# Altium PCB Module_AFE_old.PcbDoc
Units mm, origin at the board's own origin, x right, y up, seen from the top; angles counter-clockwise.
Board outline 27 x 38 mm, 4 copper layers (Top Copper Layer, Internal Copper Layer 1, Internal Copper Layer 2, Bottom Copper Layer), stack 0.38 mm thick; 5 components, 32 nets, 53 pads, 20 vias.
Unrouted connection lines stored in the file: 4.
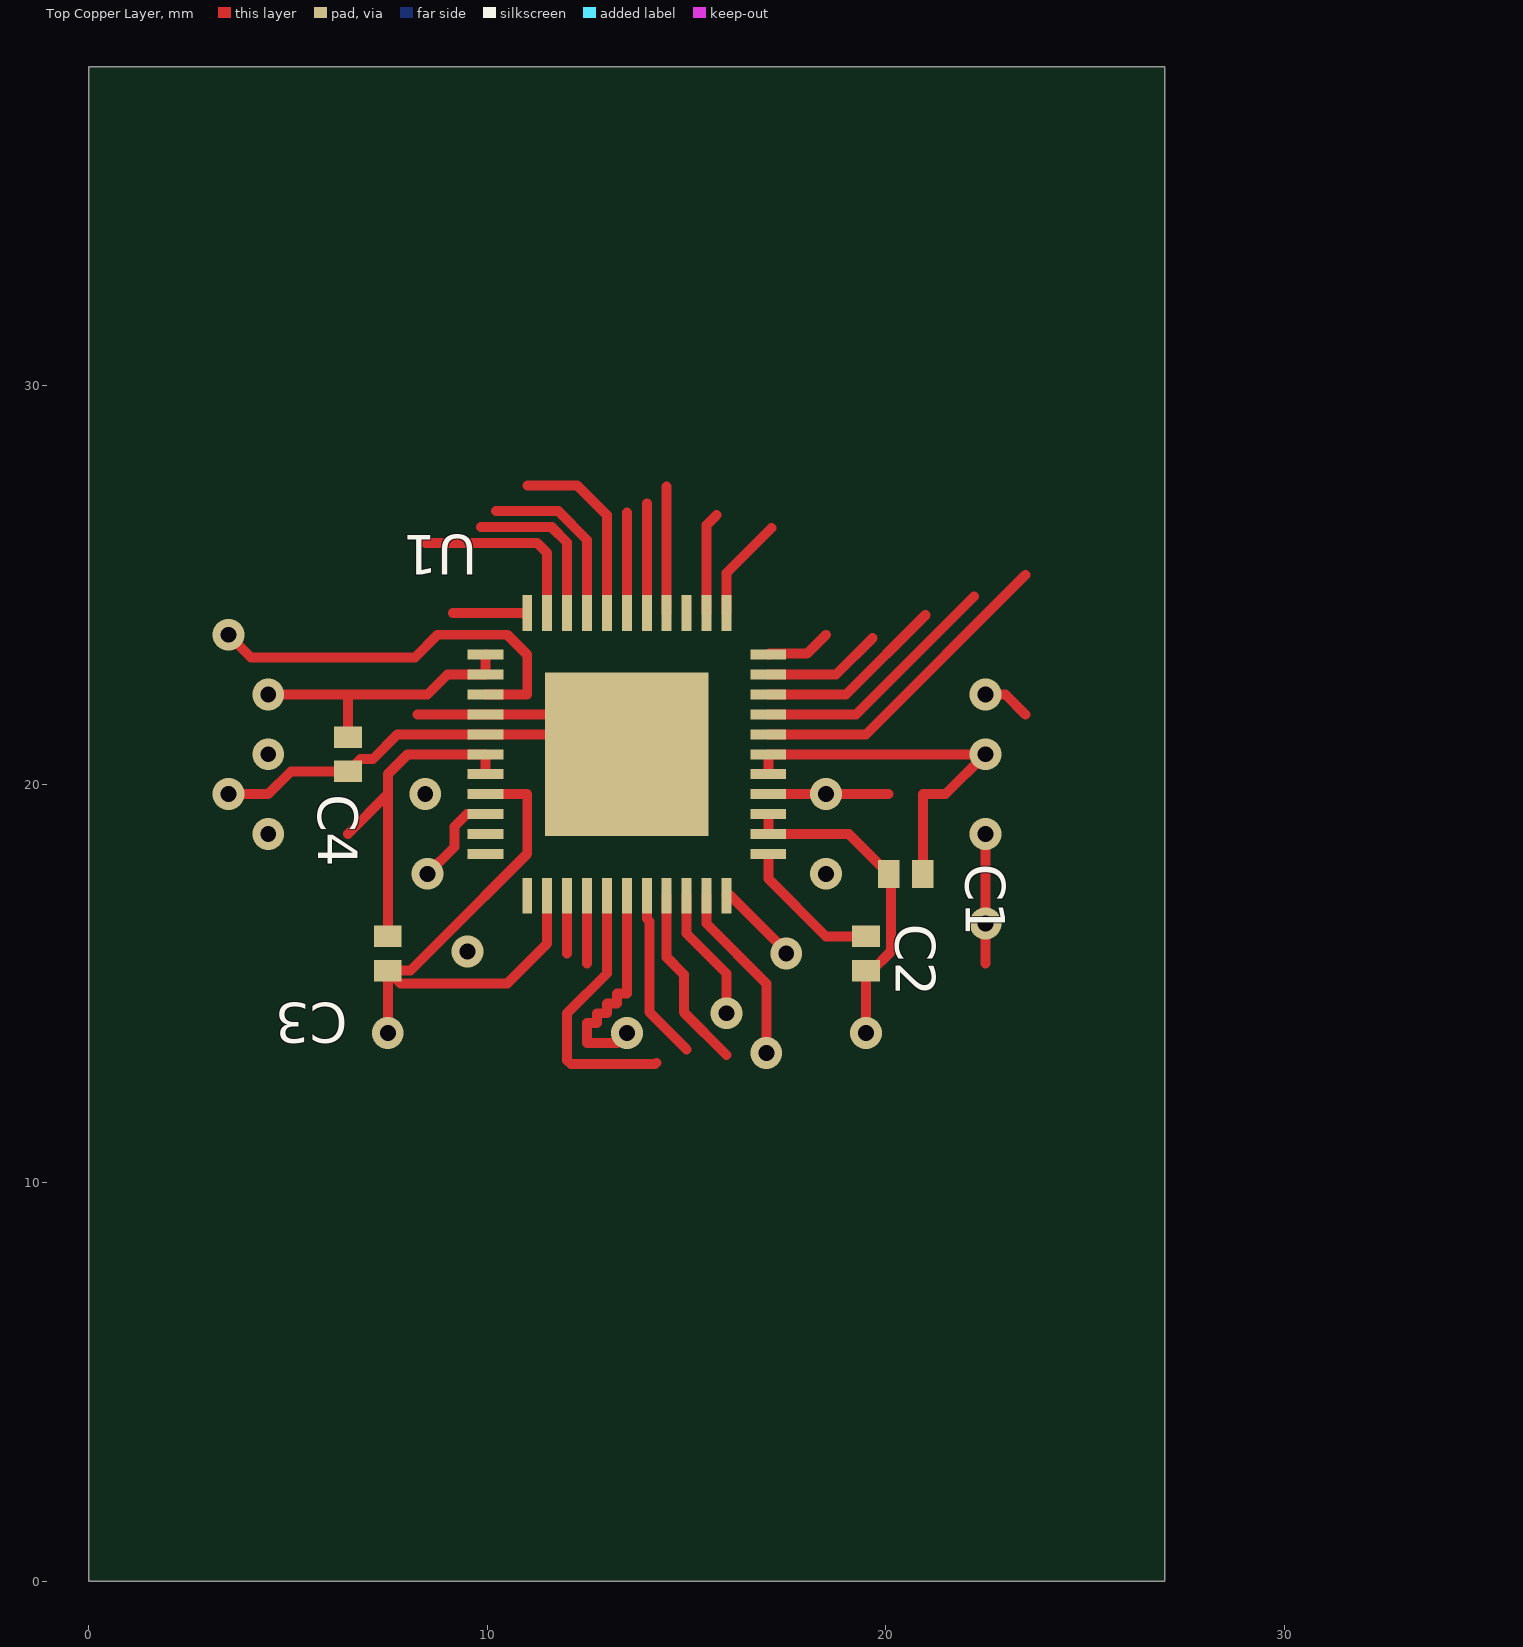
[diagram p0: Top Copper Layer view]
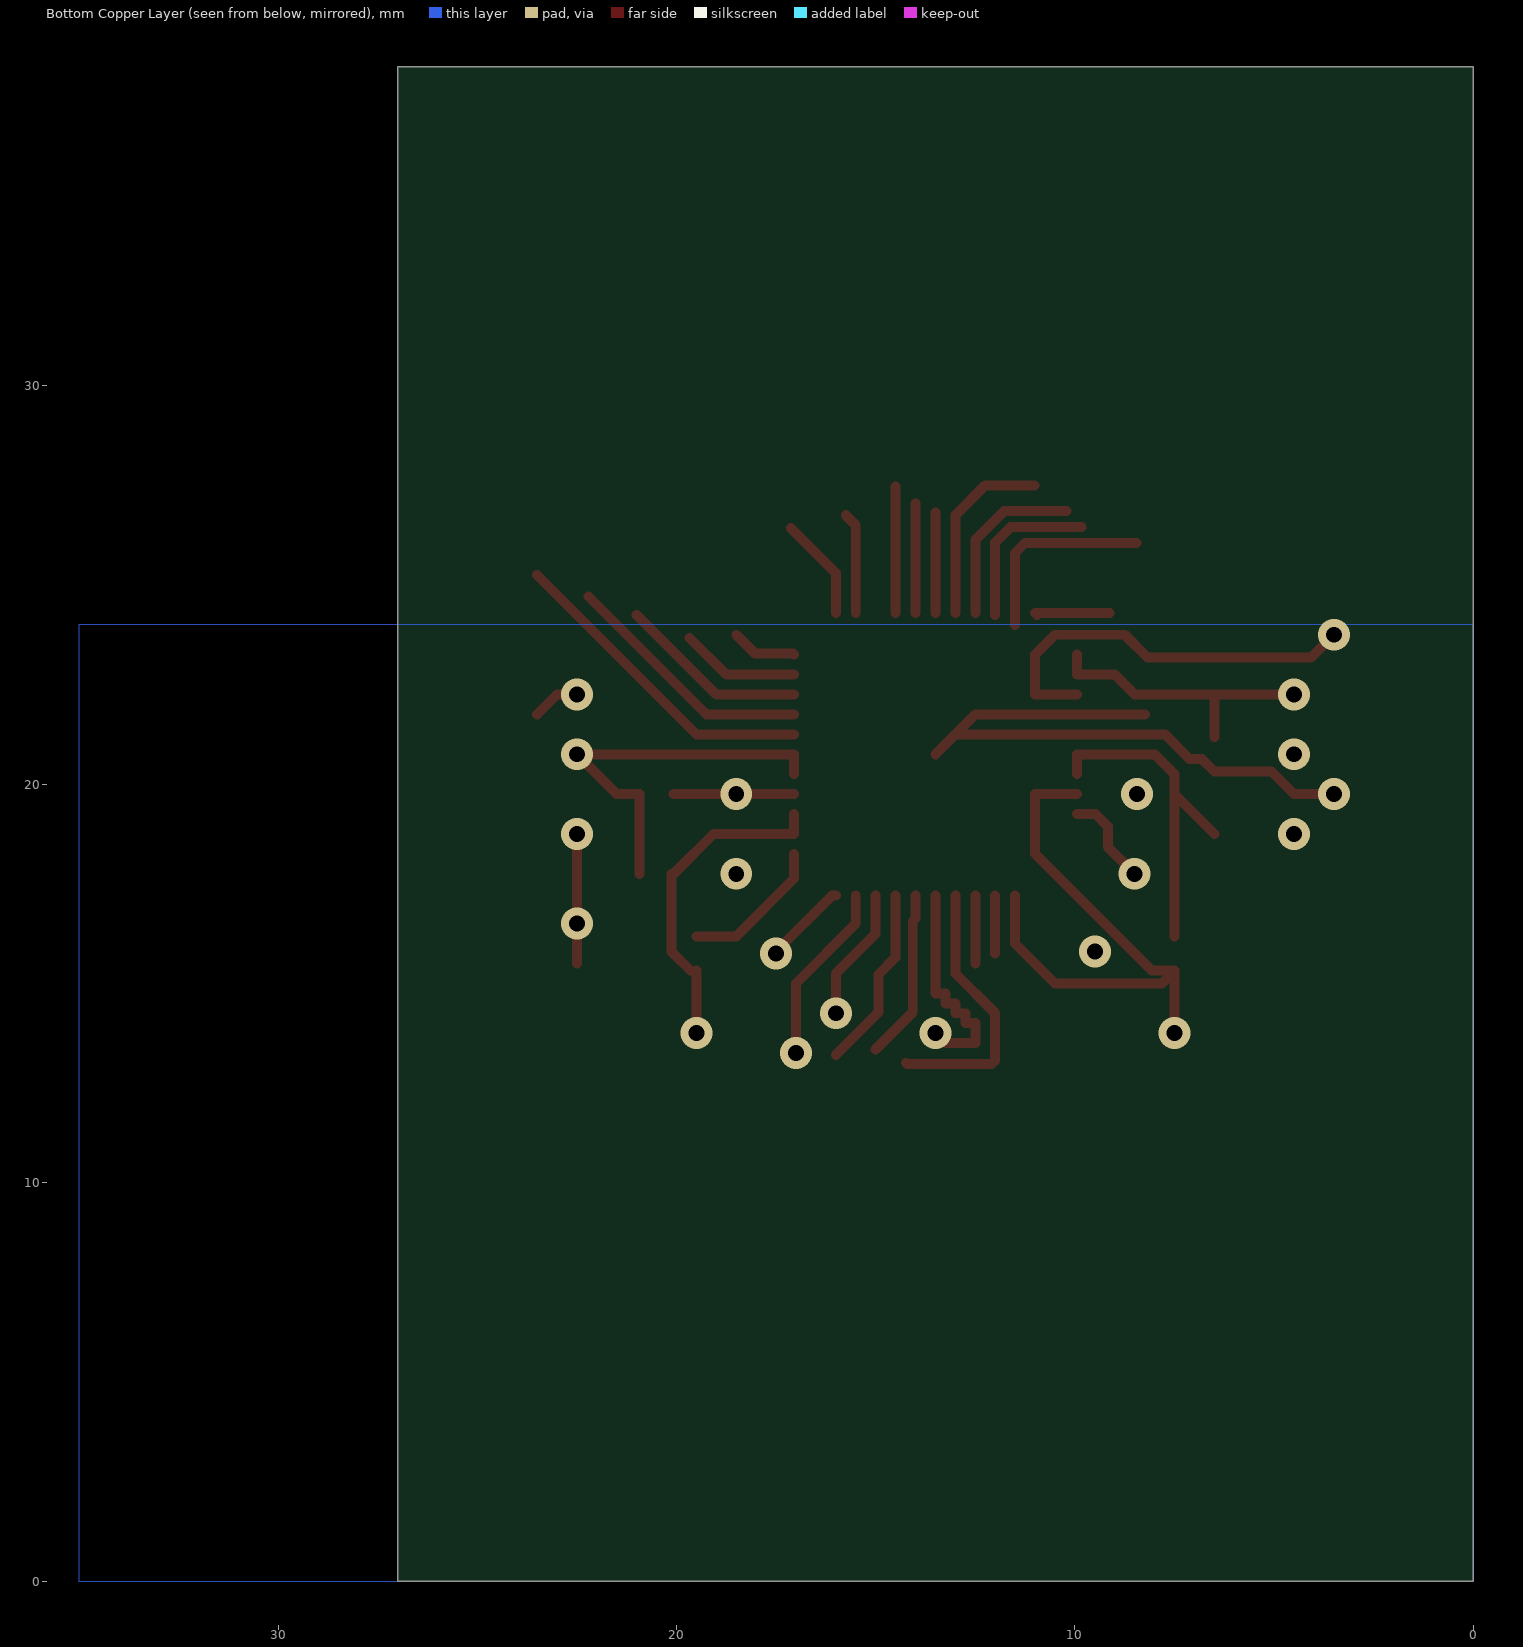
[diagram p1: Bottom Copper Layer view, seen from below]
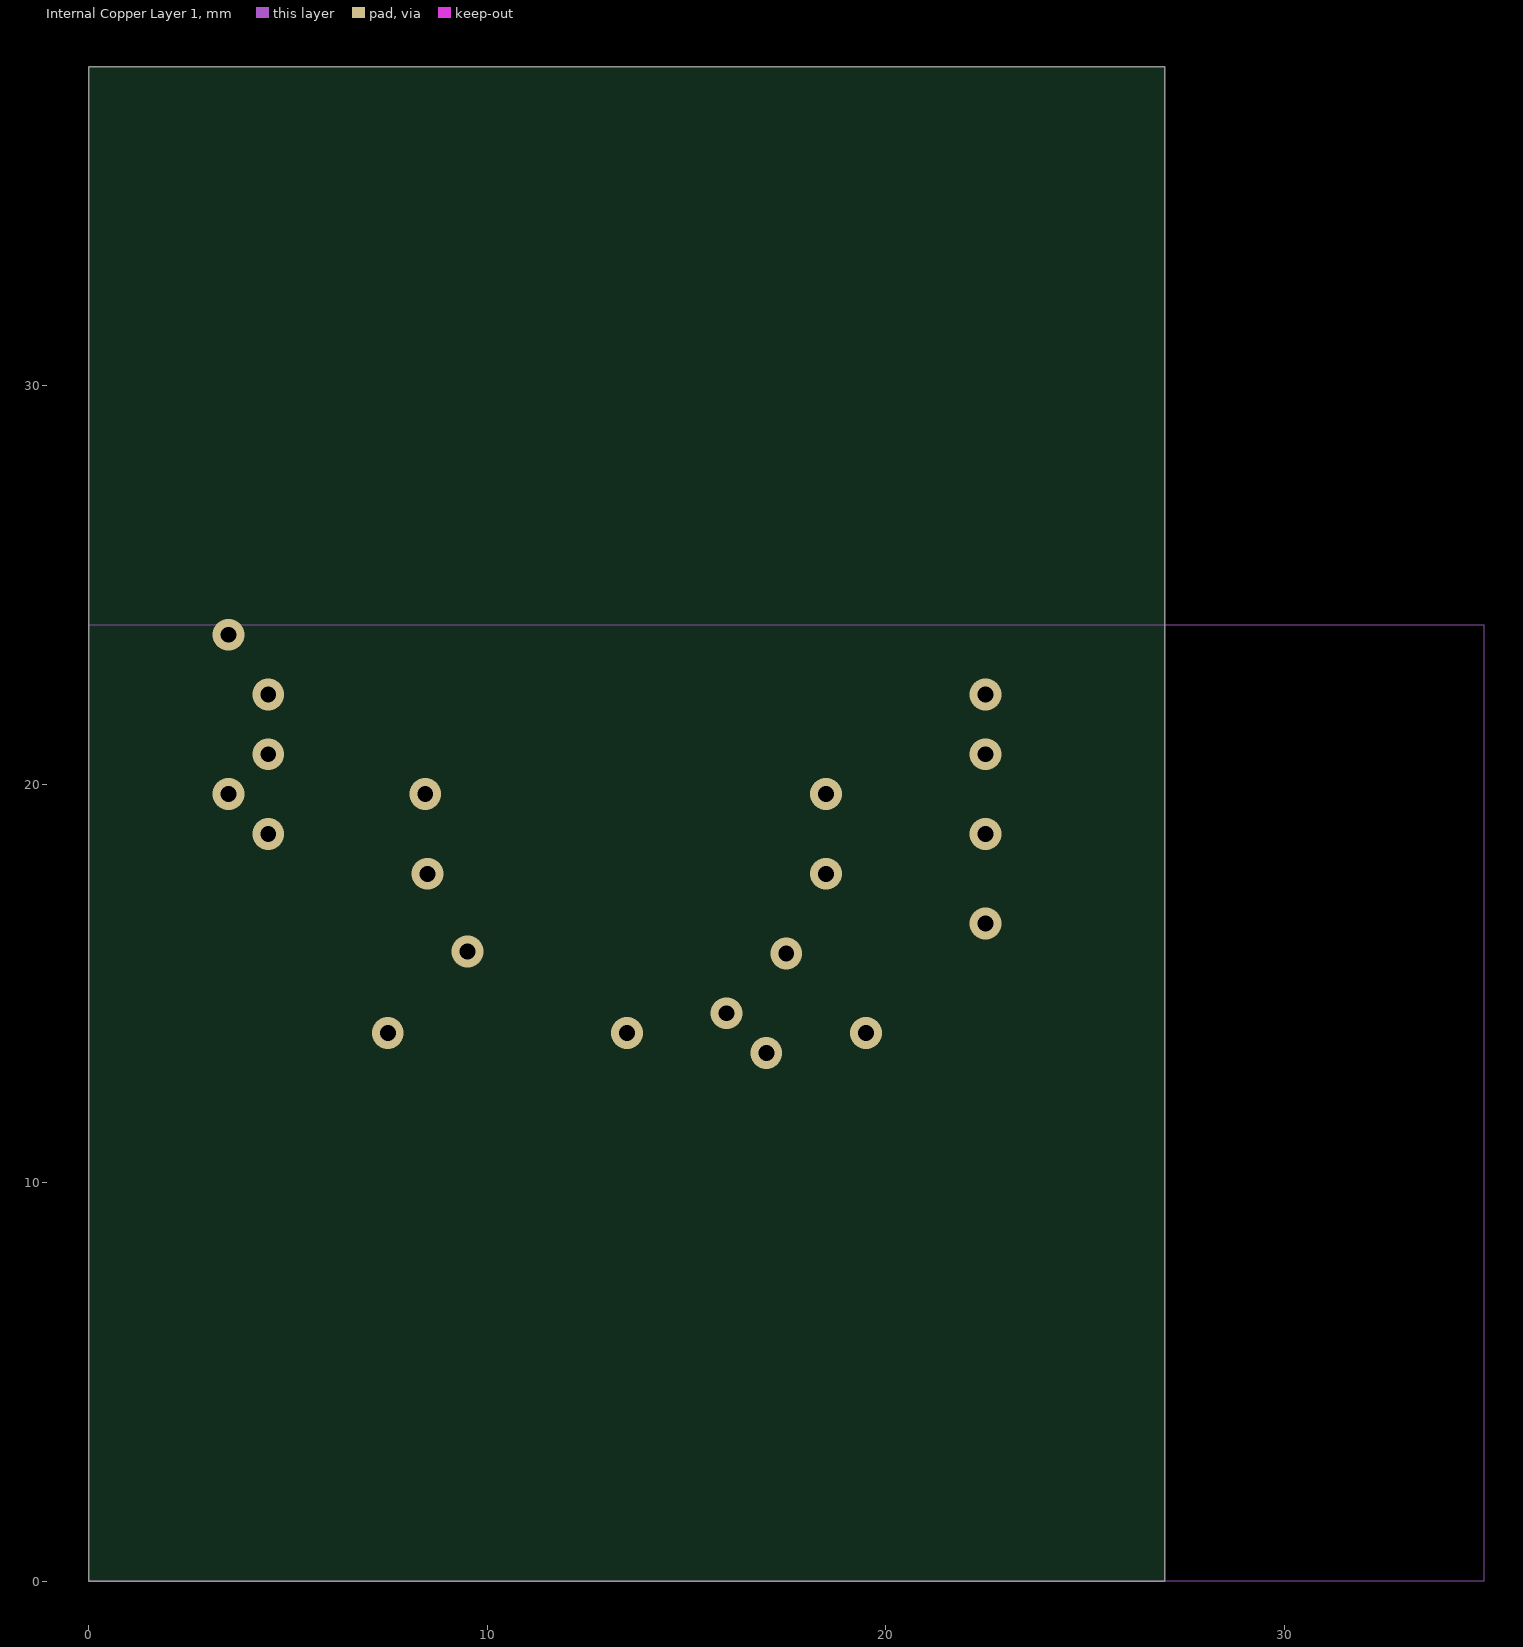
[diagram p2: Internal Copper Layer 1]
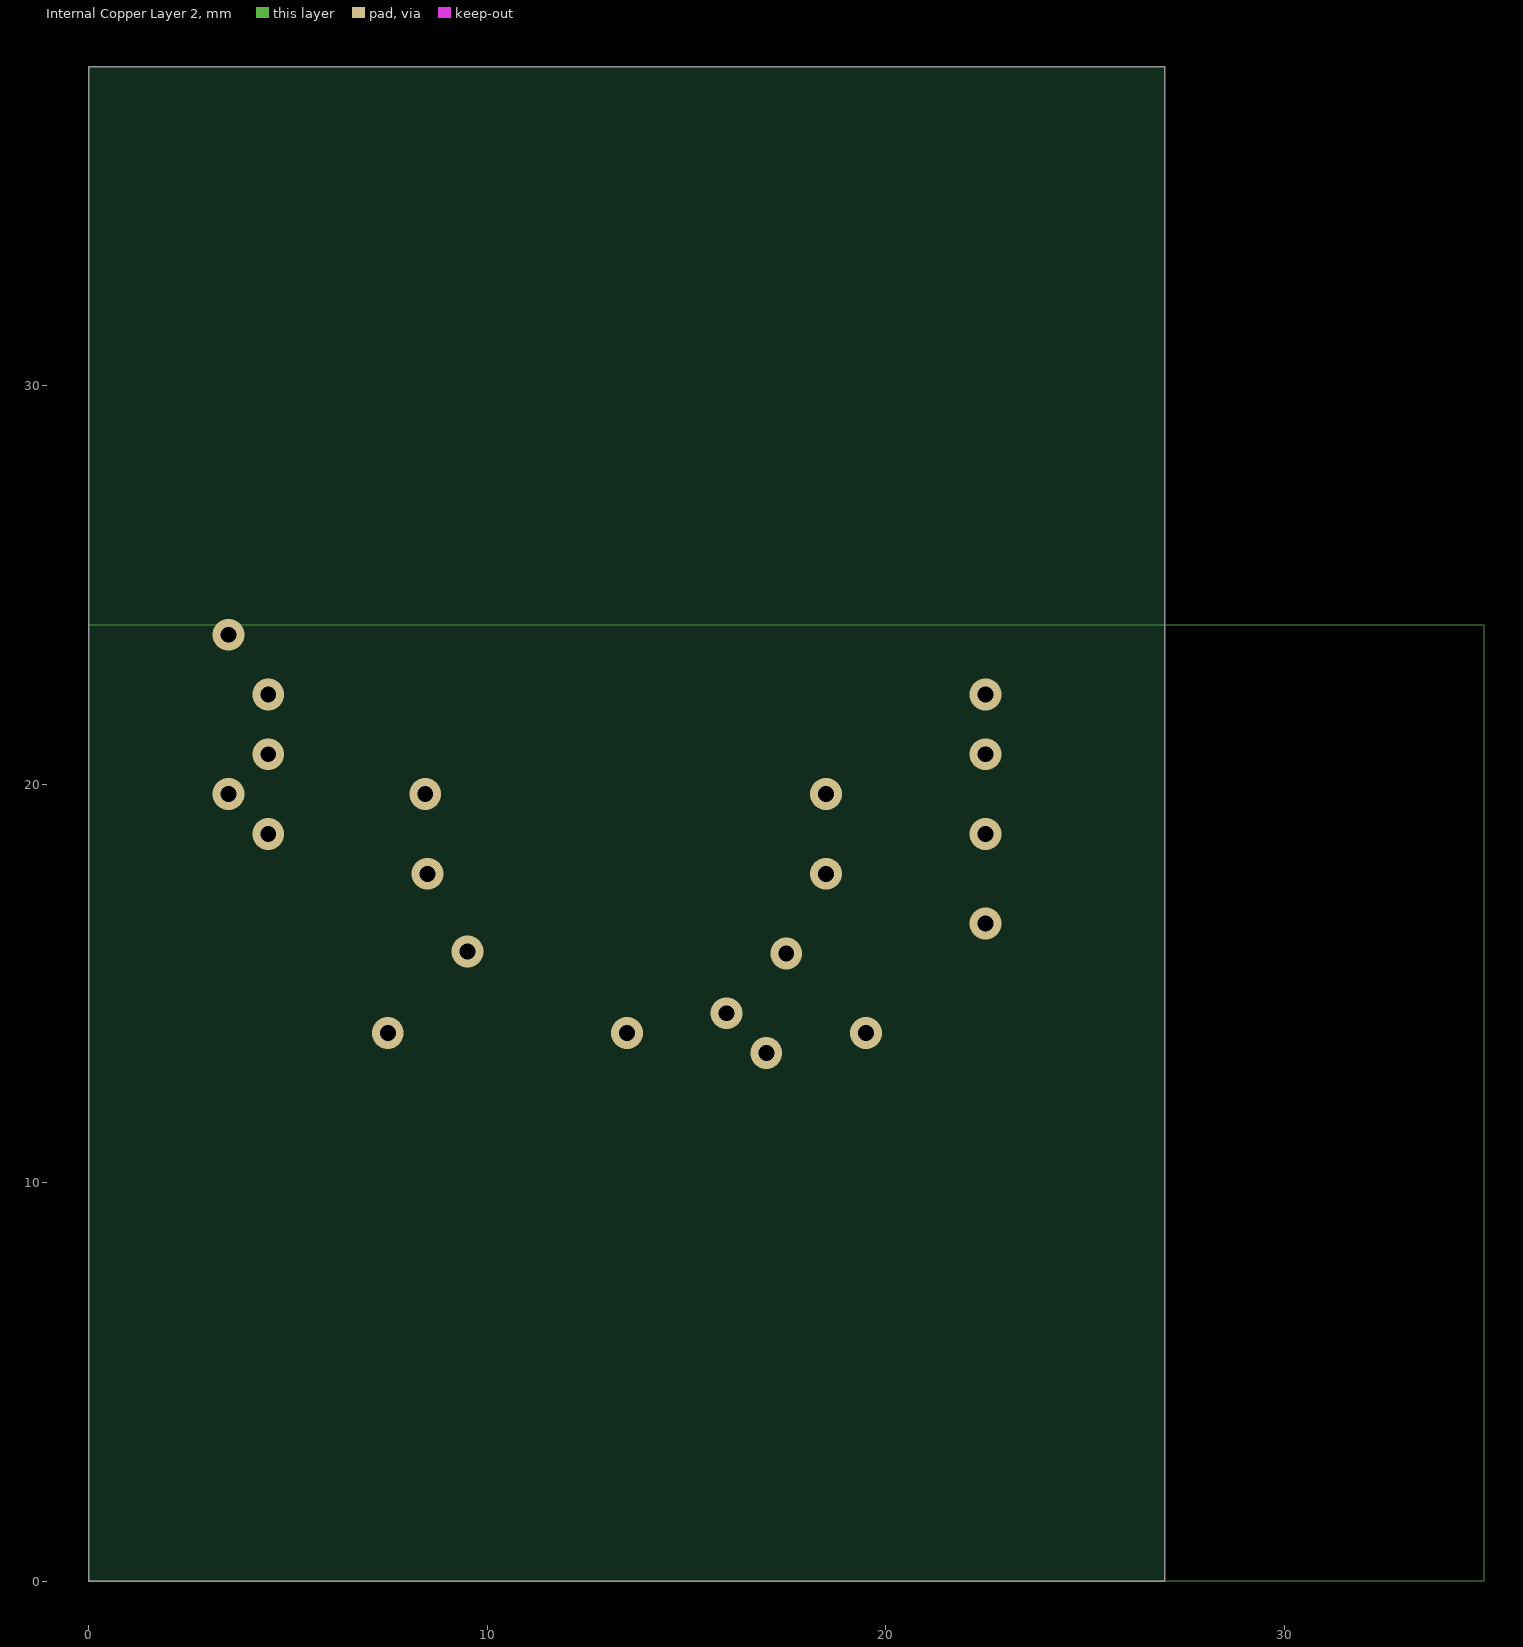
[diagram p3: Internal Copper Layer 2]

## Layer stack, top to bottom
Top Solder: solder mask 0.01, Solder Resist, Dk 3.5
Top Copper Layer: signal copper 0.0174
Dielectric 1: prepreg 0.07, FR-4, Dk 4.2
Internal Copper Layer 1: signal copper 0.0174
Dielectric 2: core 0.17, FR-4, Dk 4.2
Internal Copper Layer 2: signal copper 0.0174
Dielectric 3: prepreg 0.07, FR-4, Dk 4.2
Bottom Copper Layer: signal copper 0.0174
Bottom Solder: solder mask 0.01, Solder Resist, Dk 3.5

## Board outline
0,0 27,0 27,38 0,38

## Design rules (kind name [scope] priority, off if disabled: settings)
BoardOutlineClearance [All] p1: gap=0.25 ignorepadtopadclearanceinfootprint=FALSE except(0.175: Track-OutlineEdge)
Clearance [All] p1: gap=0.15 ignorepadtopadclearanceinfootprint=FALSE
ComponentClearance [All] p1: gap=0.1 collisioncheckmode=3 verticalgap=0.1 showdistances=FALSE
DiffPairsRouting [All] p1: maxlimit=0.254 minlimit=0.254 mostfreqgap=0.254 toplayer_minwidth=0.381 toplayer_maxwidth=0.381 toplayer_prefwidth=0.381 midlayer1_minwidth=0.381 midlayer1_maxwidth=0.381 midlayer1_prefwidth=0.381 midlayer2_minwidth=0.381 midlayer2_maxwidth=0.381 midlayer2_prefwidth=0.381 bottomlayer_minwidth=0.381 bottomlayer_maxwidth=0.381 bottomlayer_prefwidth=0.381 maxuncoupledlength=12.7
HoleSize [All] p1: absolutevalues=TRUE maxlimit=5 minlimit=0.1 maxpercent=80.000 minpercent=20.000
HoleToHoleClearance [All] p1: gap=0.275 allowstackedmicrovias=TRUE
MinimumAnnularRing [All] p1: minimumring=0.1
MinimumSolderMaskSliver [All] p1: minsoldermaskwidth=0
PlaneClearance [All] p1: clearance=0.075
PlaneConnect [All] p1: planeconnectstyle=Relief reliefexpansion=0.15 reliefentries=4 reliefconductorwidth=0.075 reliefairgap=0.075
PolygonConnect [All] p1: connectstyle=Relief reliefconductorwidth=0.3 reliefentries=4 polygonreliefangle="90 Angle" airgapwidth=0.15
RoomDefinition intanRHS2116 [InComponentClass('intanRHS2116')] p1: confinementstyle=ConfineIn formatcopy=TRUE lockcomponents=FALSE outline -122.827,-118.54 -72.027,-118.54 -72.027,-93.14 -122.827,-93.14
RoutingVias [All] p1: holewidth=0.25 width=0.55 viastyle="Through Hole" minholewidth=0.1 minwidth=0.3 maxholewidth=0.4 maxwidth=0.8
SilkToSilkClearance [All] p1: silktosilkclearance=0.15
SilkToSolderMaskClearance [IsPad] p1: minsilkscreentomaskgap=0.15 clearancetoexposedcopper=TRUE
SolderMaskExpansion [All] p1: expansion=0.075 istentingtop=FALSE
Width [All] p1: maxlimit=50 minlimit=0.075 preferedwidth=0.15
21 further rules are at their usual default settings.

## Classes and differential pairs
net class ELEC[0..15]: ELEC0 ELEC1 ELEC2 ELEC3 ELEC4 ELEC5 ELEC6 ELEC7 ELEC8 ELEC9 ELEC10 ELEC11 ELEC12 ELEC13 ELEC14 ELEC15
differential pair SCLK: +SCLK_P -SCLK_N
differential pair nCS: +nCS_P -nCS_N
differential pair MOSI: +MOSI_P -MOSI_N
differential pair MISO: +MISO_P -MISO_N

## Components (designator, comment, footprint, x,y, rotation, side; value= is the part's Value field where it differs from the comment)
C1 "capacitor_npol_ame" rcl_0402i_1005m_most 20.5,17.75 r0 top value=100nF
C2 "capacitor_npol_ame" rcl_0402i_1005m_most 19.5,15.75 r90 top value=10nF
C3 "capacitor_npol_ame" rcl_0402i_1005m_most 7.5,15.75 r90 top value=100nF
C4 "capacitor_npol_ame" rcl_0402i_1005m_most 6.5,20.75 r270 top value=100nF
U1 "Intan Technologies RHS2116 chip" QFN44_7_X_7 13.5,20.75 r0 top

## Footprints (in the part's own frame and the unit in brackets; to place one, negate y for a bottom-side part, rotate by r counter-clockwise, add the part's x,y. Pads: shape width x height; smd on the part's side, far side on the other; paste and mask are expansions set on the pad)
QFN44_7_X_7 [mm]
  rect 0.9x0.25 smd: 1(-3.55,2.5) 2(-3.55,2) 3(-3.55,1.5) 4(-3.55,1) 5(-3.55,0.5) 6(-3.55,0) 7(-3.55,-0.5) 8(-3.55,-1) 9(-3.55,-1.5) 10(-3.55,-2) 11(-3.55,-2.5) 23(3.55,-2.5) 24(3.55,-2) 25(3.55,-1.5) 26(3.55,-1) 27(3.55,-0.5) 28(3.55,0) 29(3.55,0.5) 30(3.55,1) 31(3.55,1.5) 32(3.55,2) 33(3.55,2.5)
  rect 0.25x0.9 smd: 12(-2.5,-3.55) 13(-2,-3.55) 14(-1.5,-3.55) 15(-1,-3.55) 16(-0.5,-3.55) 17(0,-3.55) 18(0.5,-3.55) 19(1,-3.55) 20(1.5,-3.55) 21(2,-3.55) 22(2.5,-3.55) 34(2.5,3.55) 35(2,3.55) 36(1.5,3.55) 37(1,3.55) 38(0.5,3.55) 39(0,3.55) 40(-0.5,3.55) 41(-1,3.55) 42(-1.5,3.55) 43(-2,3.55) 44(-2.5,3.55)
  rect 4.1x4.1 smd: CENTER(0,0)
rcl_0402i_1005m_most [mm] "Chip RCL, 0402 Imperial, 1005 Metric, 2-Leads, Body 1.00x0.5mm, IPC Most Land (Low Density)"
  rect 0.54x0.7 smd: 1(-0.43,0) 2(0.43,0)
  body extent -0.5,-0.25 0.5,0.25, height 0.5

## Part data
C1 C3 C4: "Capacitor Non-polarized American Symbol", Manufacturer=Yageo, Manuracturer Part Number=CC0402KRX7R8BB104, Package=0402, Supplier Part Number 1=311-2077-1-ND, Voltage Rating=25V, ComponentLink1Description=Datasheet, ComponentLink1URL=http://www.yageo.com/documents/recent/UPY-GPHC_X7R_6.3V-to-50V_18.pdf, Priging 1="1 	0.15000 	$0.15 (CAD)", Stock 1=143,749, Supplier 1=Digikey, Supplier Description 1="CAP CER 0.1UF 25V X7R 0402", Supplier Link 1=https://www.digikey.ca/product-detail/en/yageo/CC0402KRX7R8BB104/311-2077-1-ND/5698948
C2: "Capacitor Non-polarized American Symbol", Case Code=0402, Manufacturer="Murata Electronics North America", Manufacturer Part Number=GRM155R71H103KA88D, Tolerance=10%, Voltage Rating=25V, ComponentLink1Description="Reference Sheet", ComponentLink1URL=https://www.murata.com/~/media/webrenewal/support/library/catalog/products/capacitor/mlcc/c02e.ashx?la=en-us, Pricing 1=Free, Stock 1=8970712, Supplier 1=7PCB/Bittele, Supplier Description 1="CAP CER 0.01uF ±10% 50V X7R 0402", Supplier Link 1=https://parts.7pcb.com/, Supplier Part Number 1=GRM155R71H103KA88D
U1: library part RHS2116_QFN, Manufacturer="Intan Technologies", Manufacturer Part Number=RHS2116, ComponentLink1Discription=Datasheet, ComponentLink1URL=http://intantech.com/files/Intan_RHS2116_datasheet.pdf, ComponentLink2Discription="Bare Die", ComponentLink2URL=http://intantech.com/files/RHS2116_die_diagram.pdf, Pricing 1="1-24=325;  25-99=278;  100-249=233;  250-499=188;  500-999=151  (USD)", Supplier 1=Intan, Supplier Link 1=http://intantech.com/products_RHS2000.html, Supplier Part Number 1=RHS2116

## Via types
v1: diameter 0.8, hole 0.4, Top Copper Layer to Bottom Copper Layer, 20 vias

## Nets (pads, with @x,y where several pads share a name; then routed paths per layer and width w, separated by ;. In a path a pad name is that pad's centre, name@x,y a point inside that pad or via, vN(x,y) a via of type N, cw(c..) or ccw(c..) an arc to the next point about the centre after c; other vN are vias at no path point)
ELEC0: U1.44 | length 1.9
  Top Copper Layer w0.25: 9.13,24.3 U1.44 U1.44@10.95,24.25
ELEC1: U1.43 | length 5
  Top Copper Layer w0.25: 8.45,26.05 11.25,26.05 11.5,25.8 U1.43@11.5,24
ELEC2: U1.42 | length 4.1
  Top Copper Layer w0.25: 9.84,26.45 11.616,26.45 12,26.066 U1.42@12,24.25
ELEC3: U1.41 | length 4.4
  Top Copper Layer w0.25: 10.21,26.85 11.781,26.85 12.5,26.131 U1.41
ELEC4: U1.40 | length 4.8
  Top Copper Layer w0.25: 11.01,27.5 12.25,27.5 13,26.75 U1.40
ELEC5: U1.39 | length 2.5
  Top Copper Layer w0.25: U1.39 13.5,26.815
ELEC6: U1.38 | length 2.7
  Top Copper Layer w0.25: U1.38 14,27.05
ELEC7: U1.37 | length 3.2
  Top Copper Layer w0.25: U1.37 14.5,26.975 14.5,27.475
ELEC8: U1.36
ELEC9: U1.35 | length 2.6
  Top Copper Layer w0.25: U1.35 15.5,26.5 15.75,26.75
ELEC10: U1.34 | length 2.6
  Top Copper Layer w0.25: U1.34 16,25.3 17.13,26.43
ELEC11: U1.33 | length 1.7
  Top Copper Layer w0.25: U1.33 17.075,23.275 18.025,23.275 18.5,23.75
ELEC12: U1.32 | length 3
  Top Copper Layer w0.25: U1.32 17.75,22.75 18.75,22.75 19.67,23.67
ELEC13: U1.31 | length 4.8
  Top Copper Layer w0.25: U1.31 18,22.25 19,22.25 21,24.25
ELEC14: U1.30 | length 6.4
  Top Copper Layer w0.25: U1.30 19.25,21.75 22.21,24.71
ELEC15: U1.29 | length 8.1
  Top Copper Layer w0.25: U1.29 19.5,21.25 23.5,25.25
GND: C1.1 C2.1 C3.1 C4.1 U1.1 U1.2 U1.8 U1.13 U1.24 U1.25 | length 29.9
  Top Copper Layer w0.25: v1(4.5,22.25) 6.43,22.25 6.5,22.18 C4.1 ; 6.5,22.25 8.5,22.25 9,22.75 U1.2 U1.1 ; v1(7.5,13.75) C3.1 ; U1.8 11,19.75 11,18.254 8.825,16.079 8.825,16.075 8.07,15.32 C3.1 ; U1.13 11.5,16 10.5,15 7.82,15 C3.1 ; U1.25 U1.24 19.07,18.75 C1.1 ; v1(19.5,13.75) C2.1 ; C2.1@19.649,15.32 20.125,15.796 C1.1@20.125,17.75
LVDS_Enable: U1.26 | length 3
  Top Copper Layer w0.25: U1.26 v1(18.5,19.75) 20.07,19.75
MISO_N: U1.20 | length 3.4
  Top Copper Layer w0.25: U1.20 15,16.25 16,15.25 v1(16,14.25)
MISO_P: U1.21 | length 4.6
  Top Copper Layer w0.25: U1.21 15.5,16.5 17,15 v1(17,13.25)
MOSI_N: U1.18 | length 4.3
  Top Copper Layer w0.25: U1.18 14,16.625 14.07,16.555 14.07,14.75 14.07,14.275 15,13.345
MOSI_P: U1.19 | length 4.6
  Top Copper Layer w0.25: U1.19 14.5,15.655 14.93,15.225 14.93,14.75 14.93,14.275 16,13.205
nCS_N: U1.14 | length 2.9
  Top Copper Layer w0.25: 12,16.625 12,15.75 12,16.625 ; 12,16.625 U1.14 12,16.625
nCS_P: U1.15 | length 1.7
  Top Copper Layer w0.25: 12.5,15.5 12.5,16.625 U1.15
NetC2_2: C2.2 U1.23 | length 3.7
  Top Copper Layer w0.25: U1.23 17.05,17.63 18.5,16.18 C2.2
SCLK_N: U1.16 | length 6.8
  Top Copper Layer w0.25: U1.16 13,15.25 12,14.25 12,13.07 12.095,12.975 14.21,12.975 14.242,13.008
SCLK_P: U1.17 | length 5.8
  Top Copper Layer w0.25: v1(13.5,13.75) 13.25,13.5 12.5,13.5 12.5,14 12.75,14 12.75,14.25 13,14.25 13,14.5 13.25,14.5 13.25,14.75 13.5,14.75 U1.17
VDD: C1.2 U1.9 U1.22 U1.27 U1.28 | length 14.4
  Top Copper Layer w0.25: v1(8.5,17.75) 9.175,18.425 9.175,18.939 9.486,19.25 U1.9 ; U1.22 16.1,17.2 17.5,15.8 v1(17.5,15.75) ; U1.27 U1.28 v1(22.5,20.75) 21.5,19.75 20.93,19.75 C1.2
VREF: U1.3 | length 10.2
  Top Copper Layer w0.25: v1(3.5,23.75) 4.07,23.18 8.18,23.18 8.75,23.75 10.5,23.75 11,23.25 11,22.25 U1.3
VSTIM-: U1.CENTER
VSTIMN: C4.2 U1.4 U1.5
VSTIMP: C3.2 U1.6 U1.7 | length 8.6
  Top Copper Layer w0.25: 6.5,18.75 7.5,19.75 ; C3.2 7.5,20.25 8,20.75 U1.6 U1.7
pads on no net: U1.10 U1.11 U1.12
copper on no net: | length 20.3
  Top Copper Layer w0.25: v1(3.5,19.75) 4.5,19.75 5.07,20.32 6.5,20.32 6.815,20.635 7.125,20.635 7.74,21.25 9.95,21.25 13,21.25 ; 8.24,21.75 9.95,21.75 12.5,21.75 13,21.25 ; 13.5,20.75 13,21.25 ; 22.5,15.5 v1(22.5,16.5) v1(22.5,18.75) ; v1(22.5,22.25) 23,22.25 23.5,21.75
  other v1: 9.5,15.8 18.5,17.75 4.5,18.75 8.44,19.75 4.5,20.75

## Polygon pours and split planes (outlines as drawn)
GND on Internal Copper Layer 1 "Inner Layer 1 - GND" (solid, remove dead copper, shelved, pour order 4): 0,0 0,24 35,24 35,0
GND on Internal Copper Layer 2 "Inner Layer 2 - GND" (solid, remove dead copper, shelved, pour order 6): 0,0 0,24 35,24 35,0
GND on Bottom Copper Layer "Bottom Layer - GND" (solid, remove dead copper, shelved, pour order 10): 0,0 0,24 35,24 35,0